# Altium PCB meteostancia_RX.PcbDoc
Units mm, origin at the board's own origin, x right, y up, seen from the top; angles counter-clockwise.
Board outline 80 x 36 mm, 2 copper layers (Top Layer, Bottom Layer), stack 1.571 mm thick; 39 components, 27 nets, 145 pads, 67 vias.
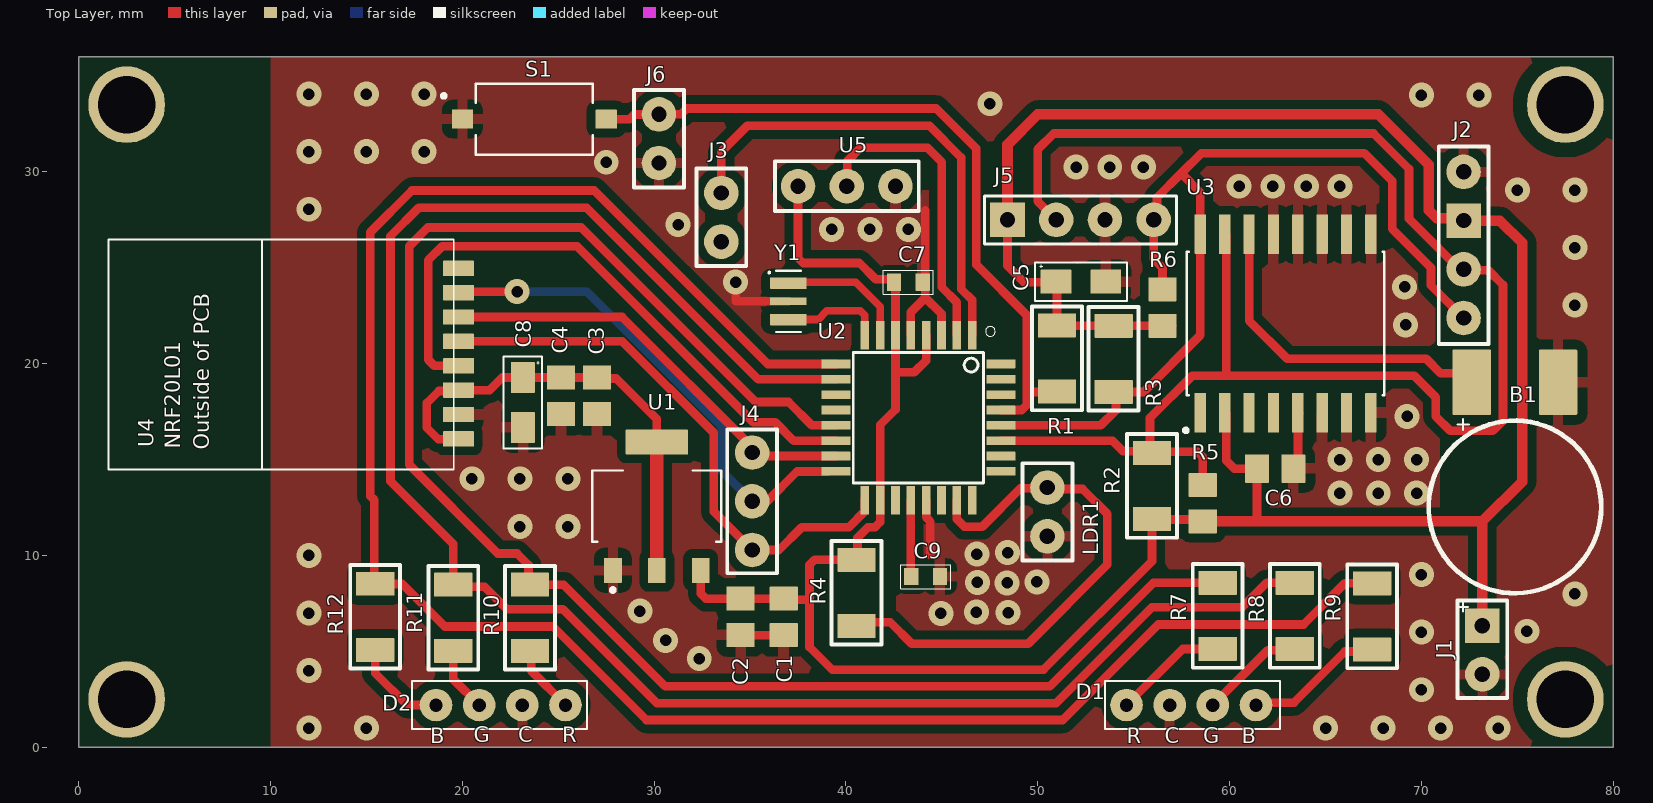
[diagram p0: Top Layer view]
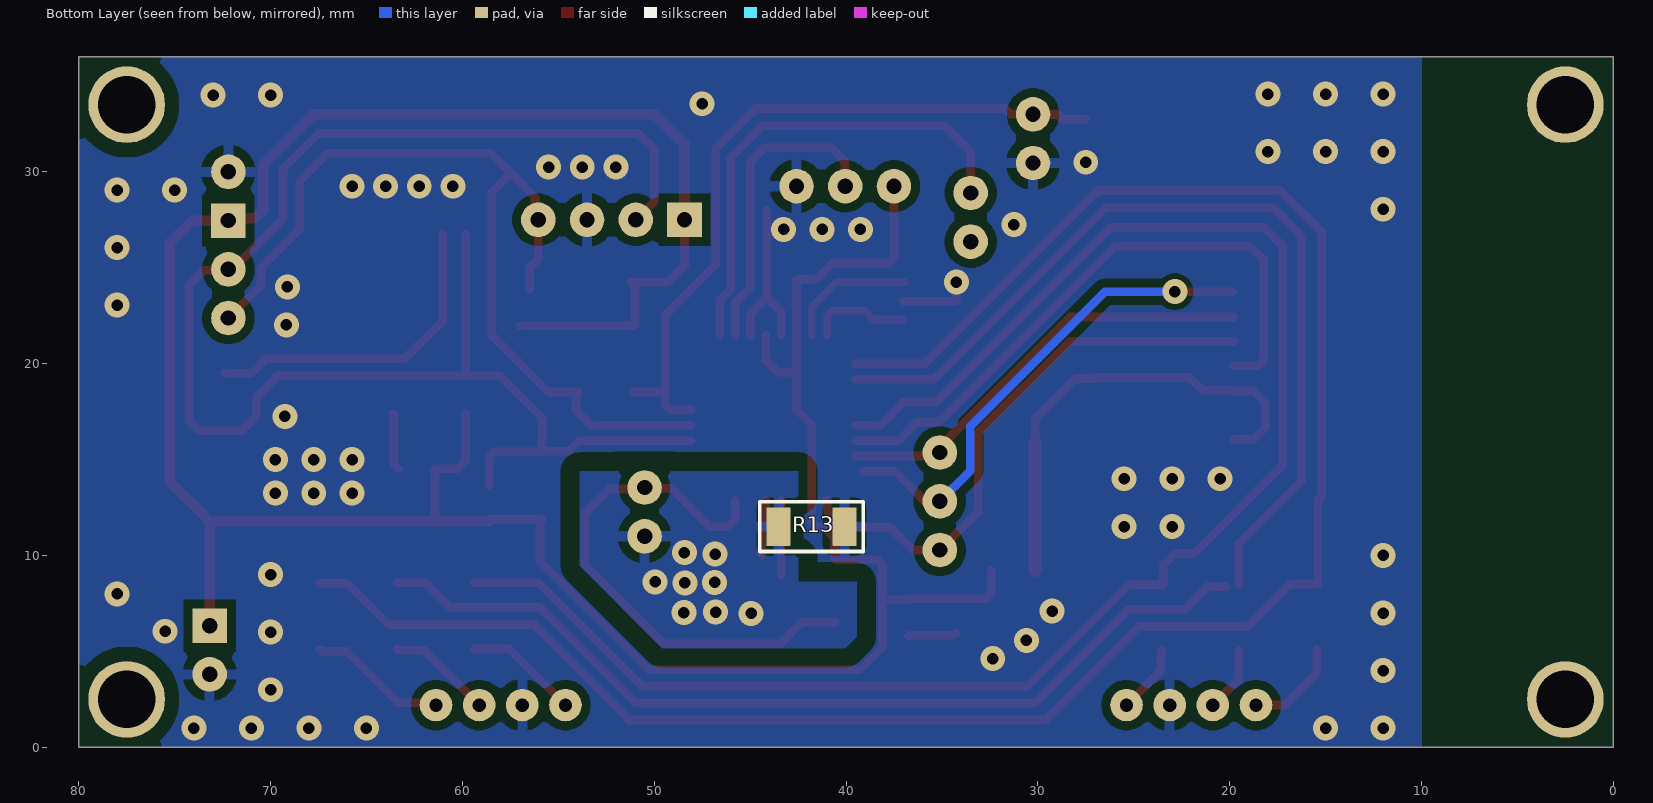
[diagram p1: Bottom Layer view, seen from below]

## Layer stack, top to bottom
Top Solder: solder mask 0.0102, Solder Resist, Dk 3.5
Top Layer: signal copper 0.0356
Dielectric 1: dielectric 1.5, FR-4, Dk 4.8
Bottom Layer: signal copper 0.0356
Bottom Solder: solder mask 0.0102, Solder Resist, Dk 3.5

## Board outline
0,36 80,36 80,0 0,0

## Design rules (kind name [scope] priority, off if disabled: settings)
BoardOutlineClearance [All] p1: gap=0 ignorepadtopadclearanceinfootprint=FALSE
Clearance Unplated_Pads_Clearance [InNet('No Net') vs OnLayer('Top Layer')] p1: gap=2 ignorepadtopadclearanceinfootprint=TRUE
Clearance Clearance_1 [InNetClass('All Nets')] p2: gap=0.45 ignorepadtopadclearanceinfootprint=FALSE except(0.2: Arc-Arc Arc-Track Track-Track SMDPad-SMDPad; 0.25: Arc-SMDPad Track-SMDPad; 0.3: Via-Fill Via-Poly Via-Region; 1: Fill-Fill Fill-Poly Fill-Region Poly-Poly Poly-Region Region-Region)
Clearance [All] p3: gap=0.45 ignorepadtopadclearanceinfootprint=FALSE except(0.2: Arc-Arc Arc-Track Track-Track SMDPad-SMDPad; 0.25: Arc-SMDPad Track-SMDPad; 0.3: Via-Fill Via-Poly Via-Region; 1: Fill-Fill Fill-Poly Fill-Region Poly-Poly Poly-Region Region-Region)
ComponentClearance [All] p1: gap=0.15 collisioncheckmode=3 verticalgap=0.15 showdistances=FALSE
DiffPairsRouting DiffPairsRouting1 [All] p2 off: maxlimit=0.254 minlimit=0.254 mostfreqgap=0.254 toplayer_minwidth=0.381 toplayer_maxwidth=0.381 toplayer_prefwidth=0.381 bottomlayer_minwidth=0.381 bottomlayer_maxwidth=0.381 bottomlayer_prefwidth=0.381 maxuncoupledlength=12.7
HoleSize [All] p1: absolutevalues=TRUE maxlimit=3.1 minlimit=0.025 maxpercent=80.000 minpercent=20.000
HoleToHoleClearance [All] p1: gap=0.2 allowstackedmicrovias=TRUE
MinimumSolderMaskSliver [All] p1: minsoldermaskwidth=0.15
PlaneClearance [All] p1: clearance=0.5
PlaneConnect PlaneConnect_1 [InPadClass('Resjump')] p1: planeconnectstyle=Direct reliefexpansion=0.508 reliefentries=4 reliefconductorwidth=0.55 reliefairgap=0.5
PlaneConnect [All] p2: planeconnectstyle=Relief reliefexpansion=0.508 reliefentries=4 reliefconductorwidth=0.254 reliefairgap=0.254
PolygonConnect PolygonConnect_1 [InComponentClass('Resjump') vs InNet('A_GND', 'GND')] p1: connectstyle=Direct reliefconductorwidth=0.254 reliefentries=4 polygonreliefangle="90 Angle" airgapwidth=0
PolygonConnect PolygonConnect_via [IsVia] p2: connectstyle=Direct reliefconductorwidth=0.254 reliefentries=4 polygonreliefangle="90 Angle" airgapwidth=0.254
PolygonConnect [All] p3: connectstyle=Relief reliefconductorwidth=0.55 reliefentries=4 polygonreliefangle="90 Angle" airgapwidth=0.5
RoutingVias [All] p1: holewidth=0.6 width=0.6 viastyle="Through Hole" minholewidth=0.6 minwidth=0.6 maxholewidth=0.6 maxwidth=1.3
SilkToSilkClearance [All] p1: silktosilkclearance=0.1
SilkToSolderMaskClearance [IsPad vs IsText] p1: minsilkscreentomaskgap=0.1 clearancetoexposedcopper=TRUE
SolderMaskExpansion SolderMaskExpansion_Vias [IsVia and not InAnyComponent] p1: expansion=0 istentingtop=FALSE
SolderMaskExpansion [All] p2: expansion=0.05 istentingtop=FALSE
SupplyNets "Schematic Supply Nets" [InNet('A_GND')] p1: voltage=0.000
SupplyNets "Schematic Supply Nets_8" [InNet('VCC')] p2: voltage=0.000
SupplyNets "Schematic Supply Nets_7" [InNet('GND')] p3: voltage=0.000
SupplyNets "Schematic Supply Nets_4" [InNet('VCC_3V')] p4: voltage=0.000
Width [All] p1: maxlimit=0.7 minlimit=0.35 preferedwidth=0.45 minimp=50.000000 maximp=50.000000 favimp=50.000000
22 further rules are at their usual default settings.

## Components (designator, comment, footprint, x,y, rotation, side; value= is the part's Value field where it differs from the comment)
B1 "+3V" "3V BATERY" 74.875,19.03 r180 top
C1 "Capicator" 0805 36.75,6.8 r90 top value=10μF
C2 "Capicator" 0805 34.5,6.8 r90 top value=0.1μF
C3 "Capicator" 0805 27.025,18.325 r90 top value=10μF
C4 "Capicator" 0805 25.135,18.325 r90 top value=0.1μF
C5 "Capicator" "CAPICATOR 293D SIZE A" 52.25,24.275 r0 top value=10μF
C6 "Capicator" 0805 62.375,14.525 r0 top value=0.1μF
C7 "Capicator" 0603 43.25,24.25 r0 top value=0.1μF
C8 "Capicator" "CAPICATOR 293D SIZE A" 23.15,17.975 r270 top value=10μF
C9 "Capicator" 0603 44.15,8.9 r0 top value=0.1μF
D1 "DIP-LED-RGB" "RGB LED DIP" 58,2.2 r0 top locked
D2 "DIP-LED-RGB" "RGB LED DIP" 22,2.2 r180 top locked
J1 "USB Type C" "18650 PLS 2" 73.175,5.072 r0 top
J2 "LCD1602 I2C" "PLS-4 - DUPLICATE" 72.2,30 r0 top locked
J3 "BACKLIGHT_LCD" PLS-2 33.5,28.9 r0 top locked
J4 "AVR ISP Programmer" PLS-3 35.109,12.825 r0 top
J5 "AHT20&BMP280" AHT20+BMP280 52.23,27.5 r0 top
J6 "AVR ISP Programmer2" PLS-2 30.25,33 r0 top
LDR1 "photoresistor" PLS-2 50.5,11 r180 top value=10k
R1 "Resistor 1206" R1206 51,20.275 r90 top value=10k
R2 "Resistor 1206" R1206 55.95,13.625 r270 top value=4.7k
R3 "Resistor 1206" R1206 53.95,20.25 r90 top value=4.7k
R4 "Resistor 1206" R1206 40.55,8.05 r90 top value=10k
R5 "Resistor 1206" 0805 58.6,12.725 r270 top value=4.3k
R6 "Resistor 1206" 0805 56.5,22.925 r270 top value=4.3k
R7 "Resistor 1206" R1206 59.379,6.85 r90 top value=100R
R8 "Resistor 1206" R1206 63.4,6.85 r90 top value=200R
R9 "Resistor 1206" R1206 67.429,6.821 r90 top value=200R
R10 "Resistor 1206" R1206 23.525,6.75 r90 top value=100R
R11 "Resistor 1206" R1206 19.525,6.75 r90 top value=200R
R12 "Resistor 1206" R1206 15.45,6.8 r90 top value=200R
R13 "Resistor 1206" R1206 41.8,11.5 r0 bottom value=0R
S1 "Switch" "SWITCH ARDUINO" 23.75,32.75 r0 top
U1 "AMS1117-3.3" AMS1117_SOT229 30.135,12.57 r0 top
U2 "ATMEGA328P" ATMEGA328 43.778,17.183 r270 top
U3 "DS3231SN_" SOIC_DS3231SN 62.92,22.095 r90 top
U4 "NRF20L01" NRF24L01 19.8,16.08 r180 top
U5 "TTP223" PLS-3 40.04,29.25 r90 top
Y1 "Ceramic Resonator" "CERAMIC RESONATOR" 37,23.25 r270 top

## Footprints (in the part's own frame and the unit in brackets; to place one, negate y for a bottom-side part, rotate by r counter-clockwise, add the part's x,y. Pads: shape width x height; smd on the part's side, far side on the other; paste and mask are expansions set on the pad)
"3V BATERY" [mm]
  rrect5% 2x3.4 smd: 1(2.25,0) 2(-2.25,0)
  silkscreen extent -4.5,1.9 4.5,11, body extent -4.49,-1.75 4.51,11, height 1.27
0603 [mm]
  rrect5% 0.75x0.9 smd: 1(-0.75,0) 2(0.75,0)
  silkscreen extent -1.3,-0.63 1.3,0.63, body extent -0.8,-0.4 0.8,0.4, height 0.45
0805 [mm]
  rrect5% 1.25x1.47 smd: 1(-0.95,0) 2(0.95,0)
  body extent -1,-0.63 1,0.63, height 0.94
"18650 PLS 2" [mm]
  rect 1.8x1.8 hole 0.8: 1(0,1.27)
  round 1.8 hole 0.8: 2(0,-1.27)
  silkscreen extent -1.3,-2.5 1.3,2.58, body extent -1.27,-2.54 1.27,2.54, height 8.7
AHT20+BMP280 [mm]
  round 1.8 hole 0.8: GND(1.27,0) SCL(3.81,0) SDA(-1.27,0)
  rect 1.8x1.8 hole 0.8: VDD(-3.81,0)
  silkscreen extent -5,-1.27 5,1.25, body extent -5.08,-1.27 5.08,1.27, height 8.7
AMS1117_SOT229 [mm]
  rrect5% 0.93x1.31 smd: 1(-2.29,-3.345) 2(0,-3.345) 3(2.29,-3.345)
  rrect5% 3.24x1.31 smd: 2(0,3.345)
  silkscreen extent -3.36,-4.47 3.36,1.86, body extent -3.1,-3.63 3.2,3.37, height 1.8
ATMEGA328 [mm]
  rrect5% 1.5x0.45 smd: 1(-4.3,2.8) 2(-4.3,2) 3(-4.3,1.2) 4(-4.3,0.4) 5(-4.3,-0.4) 6(-4.3,-1.2) 7(-4.3,-2) 8(-4.3,-2.8) 17(4.3,-2.8) 18(4.3,-2) 19(4.3,-1.2) 20(4.3,-0.4) 21(4.3,0.4) 22(4.3,1.2) 23(4.3,2) 24(4.3,2.8)
  rrect5% 0.45x1.5 smd: 9(-2.8,-4.3) 10(-2,-4.3) 11(-1.2,-4.3) 12(-0.4,-4.3) 13(0.4,-4.3) 14(1.2,-4.3) 15(2,-4.3) 16(2.8,-4.3) 26(2,4.3) 27(1.2,4.3) 28(0.4,4.3) 29(-0.4,4.3) 30(-1.2,4.3) 31(-2,4.3) 32(-2.8,4.3)
  rrect5% 0.45x1.5 smd mask+0.102: 25(2.8,4.3)
  silkscreen extent -4.75,-3.4 3.4,4, body extent -4.5,-4.5 4.5,4.5, height 1.2
"CAPICATOR 293D SIZE A" [mm]
  rrect5% 1.6x1.25 smd: 1(-1.3,0) 2(1.3,0)
  silkscreen extent -2.4,-1 2.4,1, body extent -1.6,-0.8 1.6,0.8, height 1.8
"CERAMIC RESONATOR" [mm]
  rrect5% 0.6x1.9 smd: 1(-0.95,0) 3(0.95,0)
  rrect5% 0.4x1.9 smd: 2(0,0)
  silkscreen extent -1.6,-1.05 1.6,0.65, body extent -1.6,-0.65 1.6,0.65, height 1
NRF24L01 [mm]
  rrect5% 1.6x0.8 smd: 1(0,0) 2(0,-1.27) 3(0,-2.54) 4(0,-3.81) 5(0,-5.08) 6(0,-6.35) 7(0,-7.62) 8(0,-8.89)
  silkscreen extent 0.25,-10.4 18.25,1.6, body extent 0.25,-10.4 18.25,1.6, height 1.87
PLS-2 [mm] "Штыри однорядные 1x2 конт. шаг 2.54 мм, вертик. на плату"
  round 1.8 hole 0.8: 1(0,0) 2(0,-2.54)
  silkscreen extent -1.3,-3.81 1.3,1.27, body extent -1.24,-3.81 1.3,1.27, height 8.7
PLS-3 [mm] "Штыри однорядные 1x4 конт. шаг 2.54 мм, вертик. на плату"
  round 1.8 hole 0.8: 1(0,2.54) 2(0,0) 3(0,-2.54)
  silkscreen extent -1.3,-3.75 1.3,3.75, body extent -1.27,-3.81 1.27,3.81, height 8.7
"PLS-4 - DUPLICATE" [mm] "Штыри однорядные 1x4 конт. шаг 2.54 мм, вертик. на плату"
  round 1.8 hole 0.8: 1(0,0) 3(0,-5.08) 4(0,-7.62)
  rect 1.8x1.8 hole 0.8: 2(0,-2.54)
  silkscreen extent -1.3,-8.97 1.3,1.33
R1206 [mm]
  rrect5% 1.25x2 smd: 1(-1.725,0) 2(1.725,0)
  silkscreen extent -2.7,-1.3 2.7,1.3, body extent -1.63,-0.82 1.63,0.82, height 0.7
"RGB LED DIP" [mm]
  round 1.7 hole 0.7: 1(-3.375,0) 2(-1.125,0) 3(1.125,0) 4(3.375,0)
  silkscreen extent -4.5,-1.25 4.63,1.25
SOIC_DS3231SN [mm]
  rrect5% 2.05x0.59 smd: 1(-4.655,4.445) 2(-4.655,3.175) 3(-4.655,1.905) 4(-4.655,0.635) 5(-4.655,-0.635) 6(-4.655,-1.905) 7(-4.655,-3.175) 8(-4.655,-4.445) 9(4.655,-4.445) 10(4.655,-3.175) 11(4.655,-1.905) 12(4.655,-0.635) 13(4.655,0.635) 14(4.655,1.905) 15(4.655,3.175) 16(4.655,4.445)
  silkscreen extent -5.67,-5.15 3.75,5.3, body extent -5.16,-5.15 5.16,5.15, height 2.65
"SWITCH ARDUINO" [mm]
  rrect5% 1.1x1 smd: 1(-3.75,0) 2(3.75,0)
  silkscreen extent -4.82,-1.85 3.05,1.85, body extent -4.05,-1.85 4.05,1.85, height 2.5

## Part data
B1: library part "Baterry 18650"
D1 D2: "DIP-LED-RGB catode", Package="Radial Kingbright", Availability="In Stock", Check_prices=https://www.snapeda.com/parts/WP7113ID/Kingbright/view-part/?ref=eda, MF=Kingbright, MP=WP7113ID, Price=None, Purchase-URL=https://pricing.snapeda.com/search/part/WP7113ID/?ref=eda, SnapEDA_Link=https://www.snapeda.com/parts/WP7113ID/Kingbright/view-part/?ref=snap
J1: "USB Type C, Power Only, Top mount, Center Height 1.68mm, Single Row, Surface Mount", Package=None, Check_prices=https://www.snapeda.com/parts/GSB1C411101DSHR/Amphenol/view-part/?ref=eda, MF=Amphenol, MP=GSB1C411101DSHR, SnapEDA_Link=https://www.snapeda.com/parts/GSB1C411101DSHR/Amphenol/view-part/?ref=snap
J5: library part AHT20+BMP280, "High Precision Digital Temperature And Humidity Atmospheric Pressure Sensor", Package=None, Check_prices=https://www.snapeda.com/parts/AHT20+BMP280/Estardyn/view-part/?ref=eda, MF=Estardyn, MP=AHT20+BMP280, SnapEDA_Link=https://www.snapeda.com/parts/AHT20+BMP280/Estardyn/view-part/?ref=snap
LDR1: library part Photoresistor
R1 R2 R3 R4 R5 R6 R7 R8 R9 R10 R11 R12 R13: library part R1206
  R13: ClassName=Resjump
S1: Package=None, Availability=Unavailable, MP=TL1105AF160Q, Price=None
U1: "Linear Voltage Regulator IC Positive Fixed 1 Output 1A SOT-223-3L", Package="SOT-223-3L UMW", Check_prices=https://www.snapeda.com/parts/AMS1117-3.3/UMW/view-part/?ref=eda, MF=UMW, MP=AMS1117-3.3, SnapEDA_Link=https://www.snapeda.com/parts/AMS1117-3.3/UMW/view-part/?ref=snap
U2: "AVR AVRÂ® ATmega Microcontroller IC 8-Bit 20MHz 32KB (16K x 16) FLASH 32-TQFP (7x7)", Package="TQFP-32 Microchip Technology / Atmel", Check_prices=https://www.snapeda.com/parts/ATMEGA328P-AN/Microchip/view-part/?ref=eda, MF="Microchip Technology / Atmel", MP=ATMEGA328P-AN, SnapEDA_Link=https://www.snapeda.com/parts/ATMEGA328P-AN/Microchip/view-part/?ref=snap
U3: "Real Time Clock (RTC) IC Clock/Calendar - IÂ²C, 2-Wire Serial 16-SOIC (0.295, 7.50mm Width)", Package="SOIC-16 Maxim", Availability="In Stock", Check_prices=https://www.snapeda.com/parts/DS3231SN%23/Maxim+Integrated/view-part/?ref=eda, MF="Maxim Integrated", MP=DS3231SN#, Price=None, Purchase-URL=https://pricing.snapeda.com/search/part/DS3231SN#/?ref=eda, SnapEDA_Link=https://www.snapeda.com/parts/DS3231SN%23/Maxim+Integrated/view-part/?ref=snap
Y1: "16 MHz Ceramic Resonator Built in Capacitor 15 pF Â±0.3% -20Â°C ~ 80Â°C Surface Mount", Package=None, Check_prices=https://www.snapeda.com/parts/CSTCE16M0V53-R0-/Murata/view-part/?ref=eda, MF=Murata, MP=CSTCE16M0V53-R0-, SnapEDA_Link=https://www.snapeda.com/parts/CSTCE16M0V53-R0-/Murata/view-part/?ref=snap
C1 C2 C3 C4 C6 C7 C9: Polarity=+, Types=Ceramic
C5 C8: Polarity=+, Types=Tantalum

## Free pads (board coordinates)
  round 4 hole 3: 4(2.5,2.5) 4(2.5,33.5) 4(77.5,2.5) 4(77.5,33.5)

## Via types
v1: diameter 1.3, hole 0.6, Top Layer to Bottom Layer, 67 vias

## Nets (pads, with @x,y where several pads share a name; then routed paths per layer and width w, separated by ;. In a path a pad name is that pad's centre, name@x,y a point inside that pad or via, vN(x,y) a via of type N, cw(c..) or ccw(c..) an arc to the next point about the centre after c; other vN are vias at no path point)
A_GND: C9.2 LDR1.1 R13.2 U2.21 | length 2.9
  Top Layer w0.45: U2.21 44.178,11.986 44.4,11.764 44.4,10.037
  other v1: 44.95,6.975 48.45,7.025 46.8,7.05 48.4,8.575 46.85,8.6 49.95,8.625 46.825,10.075 48.425,10.15
"CS NRF": U2.14 U4.4 | length 32.7
  Top Layer w0.45: U4.4 18.535,19.89 18.225,20.2 18.225,25.4 18.95,26.125 25.975,26.125 35.16,16.94 36.31,16.94 37.267,15.983 U2.14
GND: B1.2 C1.1 C2.1 C3.1 C4.1 C5.2 C6.2 C7.2 C8.2 D1.2 D2.2 J1.2 J2.1 J5.GND J6.2 R13.1 S1.1 U1.1 U2.3 U2.5 U3.5 U3.6 U3.7 U3.8 U3.9 U3.10 U3.11 U3.12 U3.13 U4.2 U5.3 Y1.2 | length 18.2
  Top Layer w0.45: v1(34.25,24.25) 34.25,23.25 Y1.2 ; C2.1@34.275,5.925 C2.1@34.288,5.937 ; C2.1 36.7,5.85 C1.1@36.75,5.8 ; U2.5 43.378,22.68 44.136,23.439 ; 44.125,28.005 44.125,24.3 44.136,24.289 44.136,23.439 ; U2.3 44.978,22.597 44.136,23.439 ; C6.2 63.565,14.765 63.565,17.35 U3.5@63.635,17.42
  other v1: 12,1 15,1 65,1 68,1 71,1 74,1 70,3 12,4 32.35,4.625 30.6,5.575 70,6 75.5,6.05 12,7 29.25,7.1 78,8 70,9 12,10 23,11.5 25.5,11.5 65.75,13.25 67.75,13.25 69.75,13.25 20.5,14 23,14 25.5,14 65.75,15 67.75,15 69.75,15 69.25,17.25 69.175,22.025 78,23.05 69.125,24 78,26.05 39.25,27 41.25,27 43.25,27 31.25,27.25 12,28.05 75,29.05 78,29.05 60.5,29.25 62.25,29.25 64,29.25 65.75,29.25 52,30.25 53.75,30.25 55.5,30.25 27.5,30.5 12,31.05 15,31.05 18,31.05 47.5,33.55 70,34 73,34 12,34.05 15,34.05 18,34.05
LCD_LED: J3.1 U2.1 | length 25.4
  Top Layer w0.45: J3.1 33.5,31.05 34.85,32.4 44.35,32.4 46,30.75 46,23.894 46.578,23.317 U2.1
MISO: J4.2 U2.16 U4.7 | length 25.8
  Top Layer w0.45: U4.7@19.855,23.755 v1(22.85,23.755) ; J4.2 35.9,12.825 37.45,14.375 U2.16@39.081,14.375
  Bottom Layer w0.45: v1(22.85,23.755) 26.495,23.755 33.525,16.725 33.525,14.409 J4.2
MOSI: J4.1 U2.15 U4.6 | length 23
  Top Layer w0.45: U4.6 28.32,22.43 35.241,15.509 J4.1@35.241,15.233 ; J4.1 35.291,15.183 U2.15
NetB1_1: B1.1 U3.14 | length 17
  Top Layer w0.45: U3.14 61.015,22.235 63,20.25 70.25,20.25 71,19.5 72.37,19.5 B1.1@72.4,19.53
NetC9_1: C9.1 U2.20 | length 3.9
  Top Layer w0.45: C9.1@43.378,8.988 U2.20
NetD1_1: D1.1 R7.1 | length 6
  Top Layer w0.45: D1.1 57.55,5.125 R7.1
NetD1_3: D1.3 R8.1 | length 5.5
  Top Layer w0.45: D1.3 61.989,5.064 63.338,5.064 R8.1
NetD1_4: D1.4 R9.1 | length 7.3
  Top Layer w0.45: D1.4 61.504,2.329 63.354,2.329 66.018,4.993 67.326,4.993 R9.1
NetD2_1: D2.1 R10.1 | length 3.6
  Top Layer w0.45: R10.1 23.593,4.957 23.593,3.989 25.375,2.207 D2.1
NetD2_3: D2.3 R11.1 | length 3.4
  Top Layer w0.45: R11.1 19.525,3.55 D2.3
NetD2_4: D2.4 R12.1 | length 5.1
  Top Layer w0.45: R12.1 15.45,3.875 17.122,2.203 18.622,2.203 D2.4
NetLDR1_2: LDR1.2 R4.1 U2.23 | length 28.3
  Top Layer w0.45: R4.1@40.55,6.525 42.3,6.525 43.425,5.4 49.5,5.4 53.625,9.525 53.625,12.175 52.335,13.465 50.75,13.465 50.715,13.5 49.1,13.5 47.1,11.5 46.175,11.5 45.778,11.897 U2.23
NetR7_2: R7.2 R10.2 U2.13 | length 88.1
  Top Layer w0.45: U2.13 38.217,16.783 37,18 35.3,18 26.2,27.1 18.2,27.1 17.225,26.125 17.225,14.725 21.85,10.1 22.85,10.1 23.45,9.5 23.45,8.55 R10.2 25.275,8.475 30.575,3.175 50.625,3.175 56.025,8.575 R7.2
NetR8_2: R8.2 R11.2 U2.10 | length 95.4
  Top Layer w0.45: R11.2 19.525,10.6 16.25,13.875 16.25,26.65 17.725,28.125 26.475,28.125 35.417,19.183 U2.10 ; R11.2@20.2,8.375 21.158,8.375 22.333,7.2 25.241,7.2 30.141,2.3 50.95,2.3 55.95,7.3 60.65,7.3 61.927,8.577 R8.2@63.402,8.577
NetR9_2: R9.2 R12.2 U2.9 | length 105.2
  Top Layer w0.45: R12.2@15.4,8.525 15.4,12.9 15.2,13.1 15.2,26.85 17.375,29.025 26.875,29.025 35.917,19.983 U2.9 ; R12.2@15.461,8.514 16.861,8.514 19.075,6.3 24.722,6.3 29.597,1.425 51.3,1.425 56.275,6.4 63.85,6.4 65.996,8.546 R9.2
NetU2_7: U2.7 Y1.1 | length 6.9
  Top Layer w0.4: Y1.1@36.924,24.25 40.5,24.25 41.778,22.972 U2.7
NetU2_8: U2.8 Y1.3 | length 5.3
  Top Layer w0.4: Y1.3 38.55,22.3 39,22.75 40.743,22.75 40.978,22.516 U2.8
RST: J6.1 R1.1 S1.2 U2.29 | length 37.9
  Top Layer w0.45: S1.2 28.725,32.75 28.967,32.992 29.992,32.992 J6.1@30.125,33.125 ; J6.1 31.4,33 31.7,33.3 44.7,33.3 46.785,31.215 46.785,25.165 49.425,22.525 49.425,18.525 ; U2.29 49.158,17.583 49.425,17.85 49.425,18.525 ; R1.1@51.1,18.525 49.425,18.525
SCK: J4.3 U2.17 U4.5 | length 29.5
  Top Layer w0.45: U4.5 28.34,21.16 33.1,16.4 33.1,12.294 J4.3 36.501,10.285 37.69,11.475 40.15,11.475 40.978,12.303 U2.17@40.978,12.92
SCL: J2.4 J5.SCL R3.1 R6.1 U2.28 U3.16 | length 49.4
  Top Layer w0.45: U2.28 53.283,16.783 54.075,17.575 R3.1@54.075,18.525 ; R3.1 R3.1@54.075,18.525 ; R3.1@54.075,18.528 R3.1@54.075,18.525 ; R6.1 56.5,25 56.04,25.46 J5.SCL 56.211,27.671 56.211,28.656 57.477,29.922 ; J2.4 70.5,24.08 70.5,25 68.475,27.025 68.475,29.525 67.028,30.972 58.528,30.972 57.477,29.922 ; R3.1@54.075,18.525 55.525,18.525 58.475,21.475 U3.16 58.475,28.925 57.477,29.922
SDA: J2.3 J5.SDA R2.1 R5.1 U2.27 U3.15 | length 83.3
  Top Layer w0.45: U2.27 53.892,15.983 54.439,15.436 55.814,15.436 R2.1@55.85,15.4 ; J5.SDA 50,28.46 50,31.175 50.825,32 67.5,32 69.35,30.15 69.35,27.555 72.034,24.871 73.479,24.871 74.25,24.1 74.25,17.025 73.725,16.5 71.5,16.5 70.75,17.25 70.75,18.25 69.625,19.375 59.825,19.375 ; R5.1 58.6,15.136 58.336,15.4 R2.1@55.85,15.4 ; U3.15@59.825,26.73 59.825,19.375 ; R2.1@55.85,15.4 55.85,17.175 58.05,19.375 59.825,19.375
TOUCH: U2.2 U5.2 | length 16.2
  Top Layer w0.45: U5.2 40.059,29.269 40.059,30.559 40.75,31.25 44.25,31.25 45,30.5 45,23.975 45.778,23.197 U2.2
VCC: C1.2 C2.2 C5.1 C6.1 C7.1 J1.1 J2.2 J5.VDD R1.2 R2.2 R3.2 R4.2 R5.2 R6.2 U1.3 U2.4 U2.6 U2.18 U3.2 U5.1 | length 158.4
  Top Layer w0.45: U1.3 32.425,8.014 32.689,7.75 C2.2 36.7,7.75 36.75,7.7 38.1,7.7 ; U5.1 37.5,25.514 37.764,25.25 40.7,25.25 41.548,24.402 42.598,24.402 42.625,24.375 C7.1@42.625,24.2 ; R4.2 38.364,9.775 38.1,9.511 38.1,7.7 ; R4.2@40.6,9.975 40.6,10.93 41.148,11.478 41.514,11.478 41.778,11.741 U2.18 41.778,16.808 42.578,17.608 42.578,19.546 ; C7.1@42.578,24.097 U2.6 42.578,19.546 ; U2.4 44.178,20.164 43.56,19.546 42.578,19.546 ; J5.VDD 48.42,25.105 49.275,24.25 51.225,24.25 51,24.025 R1.2 ; R1.2@51.1,21.975 R3.2@54.025,21.975 ; R3.2@54.075,21.975 R6.2@56.675,21.975 ; R2.2@55.85,11.875 R2.2@55.95,11.875 ; R2.2 R2.2@55.95,11.875 ; R5.2@58.6,11.875 R2.2@55.95,11.875 ; U3.2@59.825,17.42 59.825,14.95 60.25,14.525 C6.1 61.425,11.775 ; 38.1,7.7 38.1,5.225 39.275,4.05 50.3,4.05 55.95,9.7 R2.2@55.95,11.875
  Top Layer w0.55: J5.VDD 48.42,31.42 50,33 67.75,33 70.375,30.375 70.375,28.003 70.797,27.58 72.08,27.58 J2.2 74.09,27.46 75.25,26.3 75.25,13.85 73.175,11.775 ; R5.2 61.425,11.775 73.175,11.775 ; J1.1@73.175,6.65 73.175,11.775
VCC_3V: C3.2 C4.2 C8.1 U1.2 U4.1 U4.3 | length 24.3
  Top Layer w0.45: U4.1@19.77,16.05 18.75,16.05 18.15,16.65 18.15,17.95 18.775,18.575 19.755,18.575 U4.3 21.42,18.62 22.075,19.275 C8.1 ; C8.1@23.29,19.275 C4.2 C3.2@26.955,19.275 ; C3.2 27.075,19.225 28.025,19.225 30.125,17.125 30.125,15.925 U1.2@30.135,15.915
  Top Layer w0.7: U1.2@30.135,9.225 U1.2@30.135,15.915
pads on no net: J3.2 U2.11 U2.12 U2.19 U2.22 U2.24 U2.25 U2.26 U2.30 U2.31 U2.32 U3.1 U3.3 U3.4 U4.8

## Polygon pours and split planes (outlines as drawn)
A_GND on Bottom Layer "A_GND_L02_P004" (solid, pour order 4): 42.5,5.175 49.575,5.175 53.875,9.475 53.875,14.383 42.5,14.383
A_GND on Bottom Layer "A_GND_L02_P001" (solid, pour order 1): 43.412,8.625 39.45,8.625 39.45,5.763 40.038,5.175 43.568,5.175
GND on Bottom Layer "GND_L02_P005" (solid, remove dead copper, pour order 5): 80,36 80,0.022 9.975,0.022 9.975,36
GND on Top Layer "GND_L01_P003" (solid, remove dead copper, pour order 3): 10,36 80,36 80,0 10,0
A_GND on Top Layer "A_GND_L01_P000" (solid, pour order 0): 43.275,6.1 53.525,6.1 53.525,14.375 52.85,15.05 42.625,15.05 42.625,6.825 43.3,6.15

## Other copper
Top Layer:
  pour cut-out: 50.75,15.475 51.05,15.175 54.075,15.175 54.075,12.9 53.95,12.775 53.26,13.465 50.75,13.465
  pour cut-out: 70.725,23.85 70.725,20.45 71.575,20.45 71.675,20.55 71.45,20.775 71.45,23.725 70.875,23.725 70.75,23.85
  pour cut-out: 47.075,20.5 47.05,20.475 47.05,13.825 41.9,13.825 41.875,13.85 41.875,20.5
  pour cut-out: 70.95,16.4 70.95,11.75 71.05,11.65 73.4,11.65 73.4,12.05 75.275,13.925 75.1,14.1 75.1,16.8 71.4,16.8 71.025,16.425
Bottom Layer:
  pour cut-out: 48.95,15.417 52.086,15.417 50.5,13.832 50.5,13.54
Multi-Layer:
  pour cut-out: 74.75,2.5 ccw(c77.5,2.5) 77.5,-0.25 ccw(c77.5,2.5) 80.25,2.5 ccw(c77.5,2.5) 77.5,5.25 ccw(c77.5,2.5)
  pour cut-out: 74.75,33.5 ccw(c77.5,33.5) 77.5,30.75 ccw(c77.5,33.5) 80.25,33.5 ccw(c77.5,33.5) 77.5,36.25 ccw(c77.5,33.5)
  pour cut-out: 75.237,33.5 ccw(c77.5,33.5) 77.5,31.237 ccw(c77.5,33.5) 79.763,33.5 ccw(c77.5,33.5) 77.5,35.763 ccw(c77.5,33.5)

## Silkscreen, mask and mechanical layers (free items; w line width, h text height)
Mechanical 1:
  circle w0.254: c77.5,33.5 r2.75

## Text inside footprints (layer, text, board x,y; h text height)
D1: Top Overlay "R" at 54.625,0.2 h0.8; Top Overlay "C" at 56.625,0.2 h0.8; Top Overlay "G" at 58.625,0.2 h0.8; Top Overlay "B" at 60.625,0.2 h0.8
D2: Top Overlay "R" at 25.2,0.254 h0.8; Top Overlay "C" at 22.9,0.254 h0.8; Top Overlay "G" at 20.6,0.254 h0.8; Top Overlay "B" at 18.325,0.2 h0.8
U4: Top Overlay "Outside of PCB" at 6.8,15.5 h0.8 r90